# Altium PCB Keyfinder.PcbDoc
Units mm, origin at the board's own origin, x right, y up, seen from the top; angles counter-clockwise.
Board outline 46.05 x 36.17 mm, 2 copper layers (Top Layer, Bottom Layer); 23 components, 21 nets, 96 pads, 5 vias.
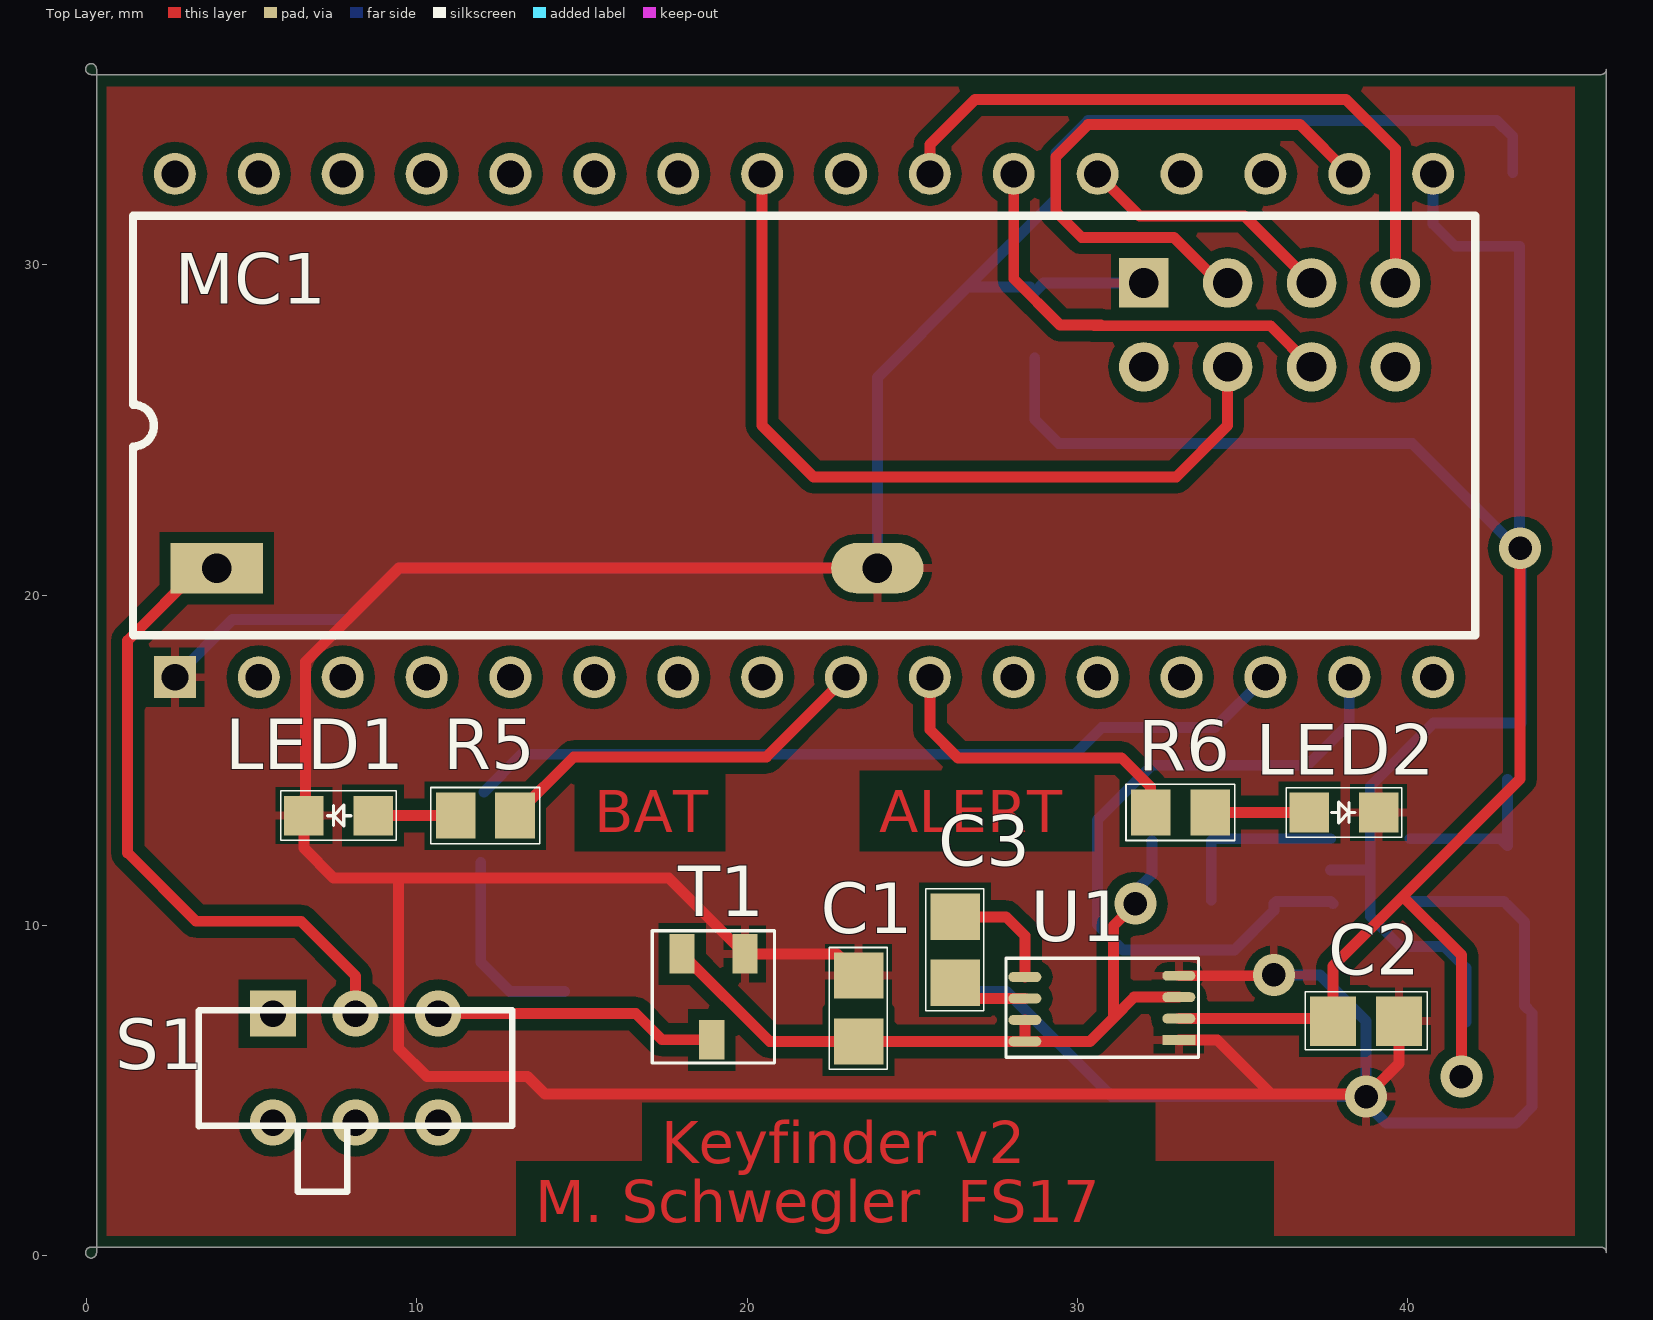
[diagram p0: Top Layer view]
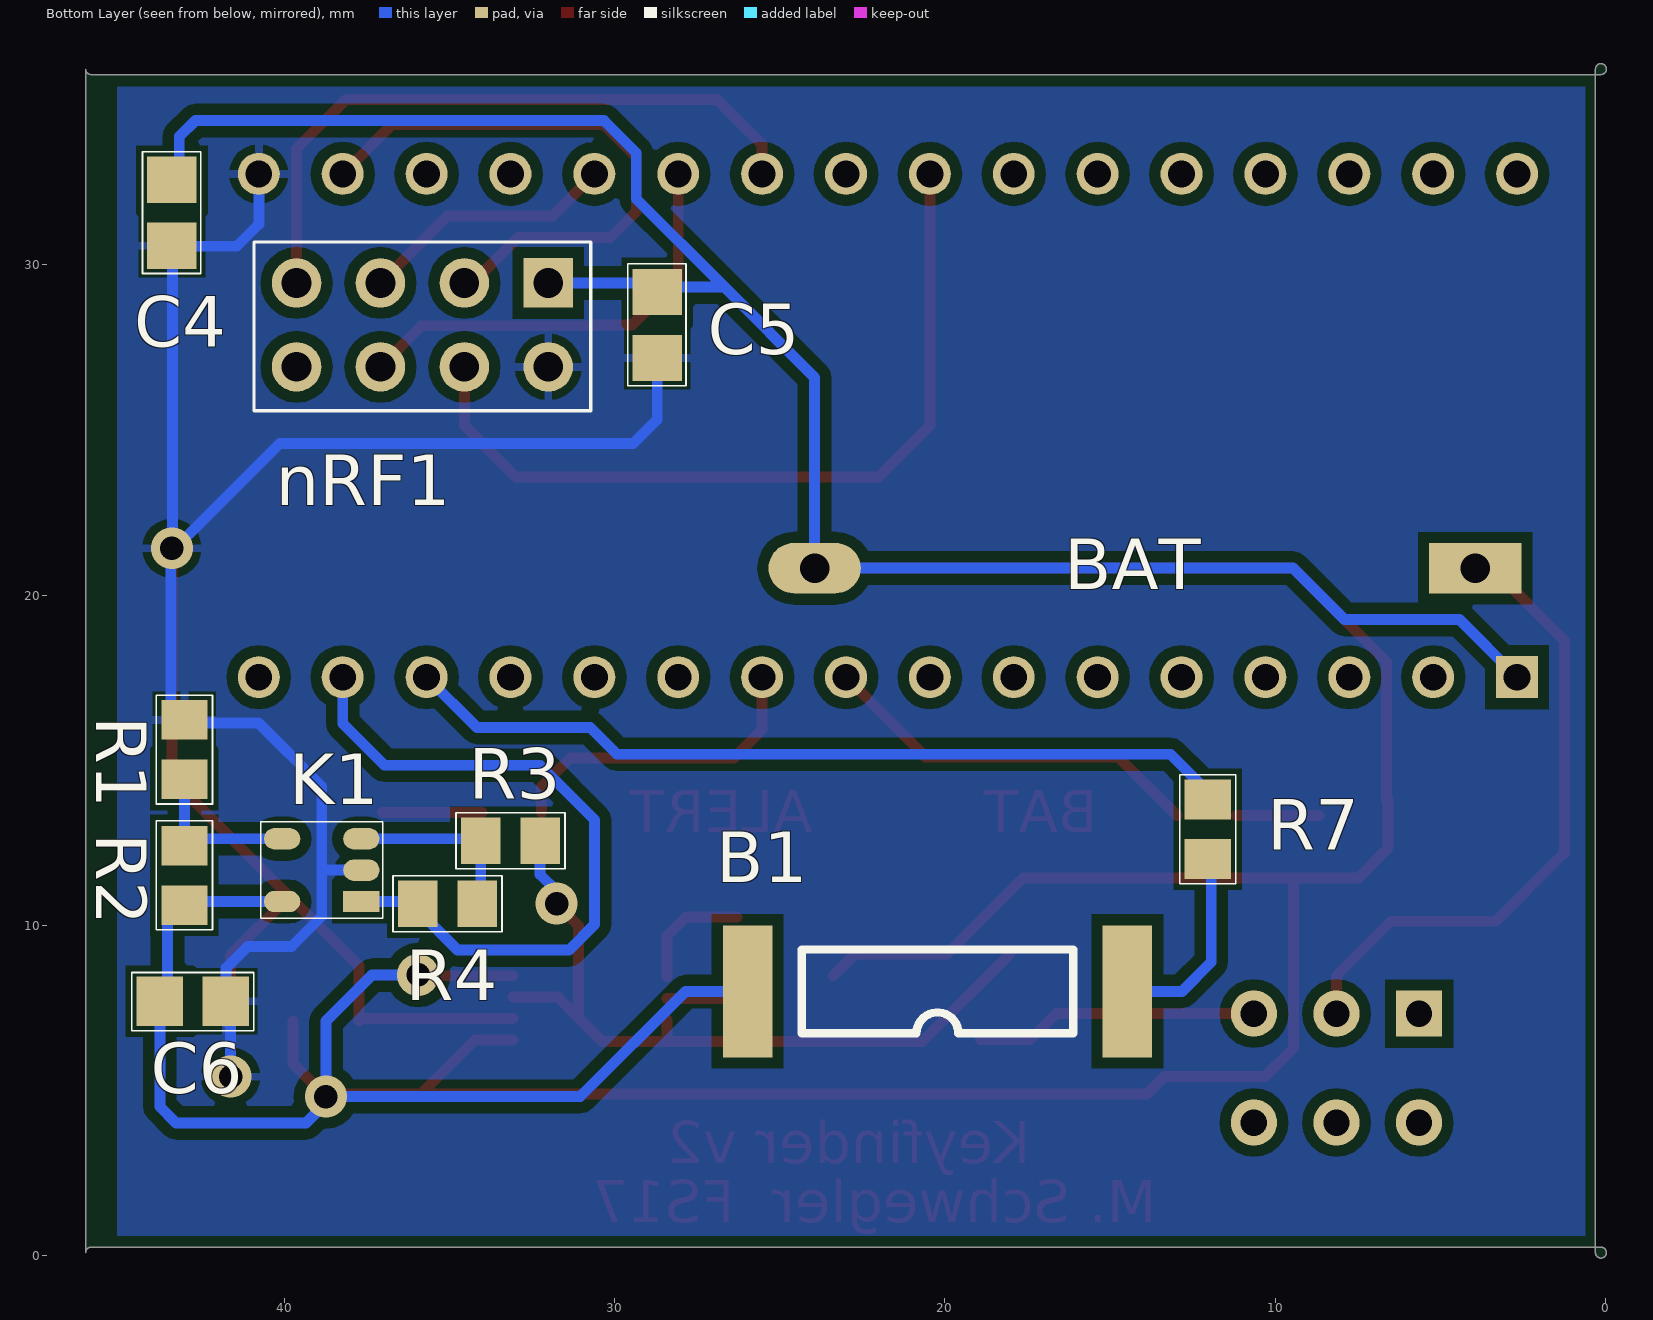
[diagram p1: Bottom Layer view, seen from below]
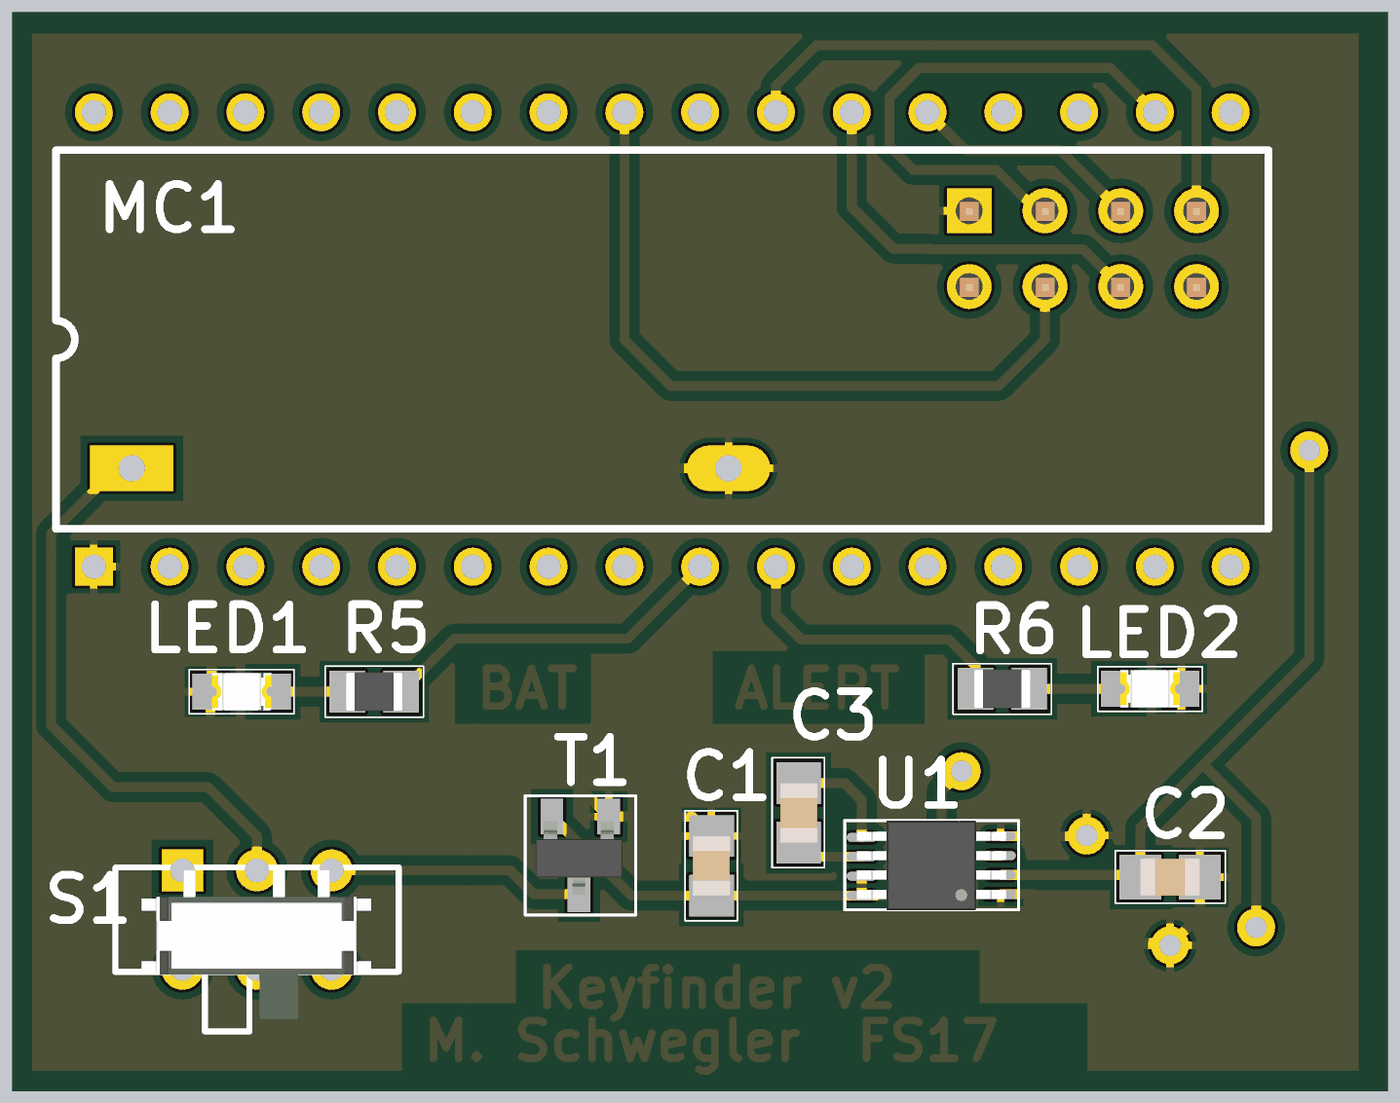
[diagram p2: 3D render of the assembled board from above, using the file's embedded part models]
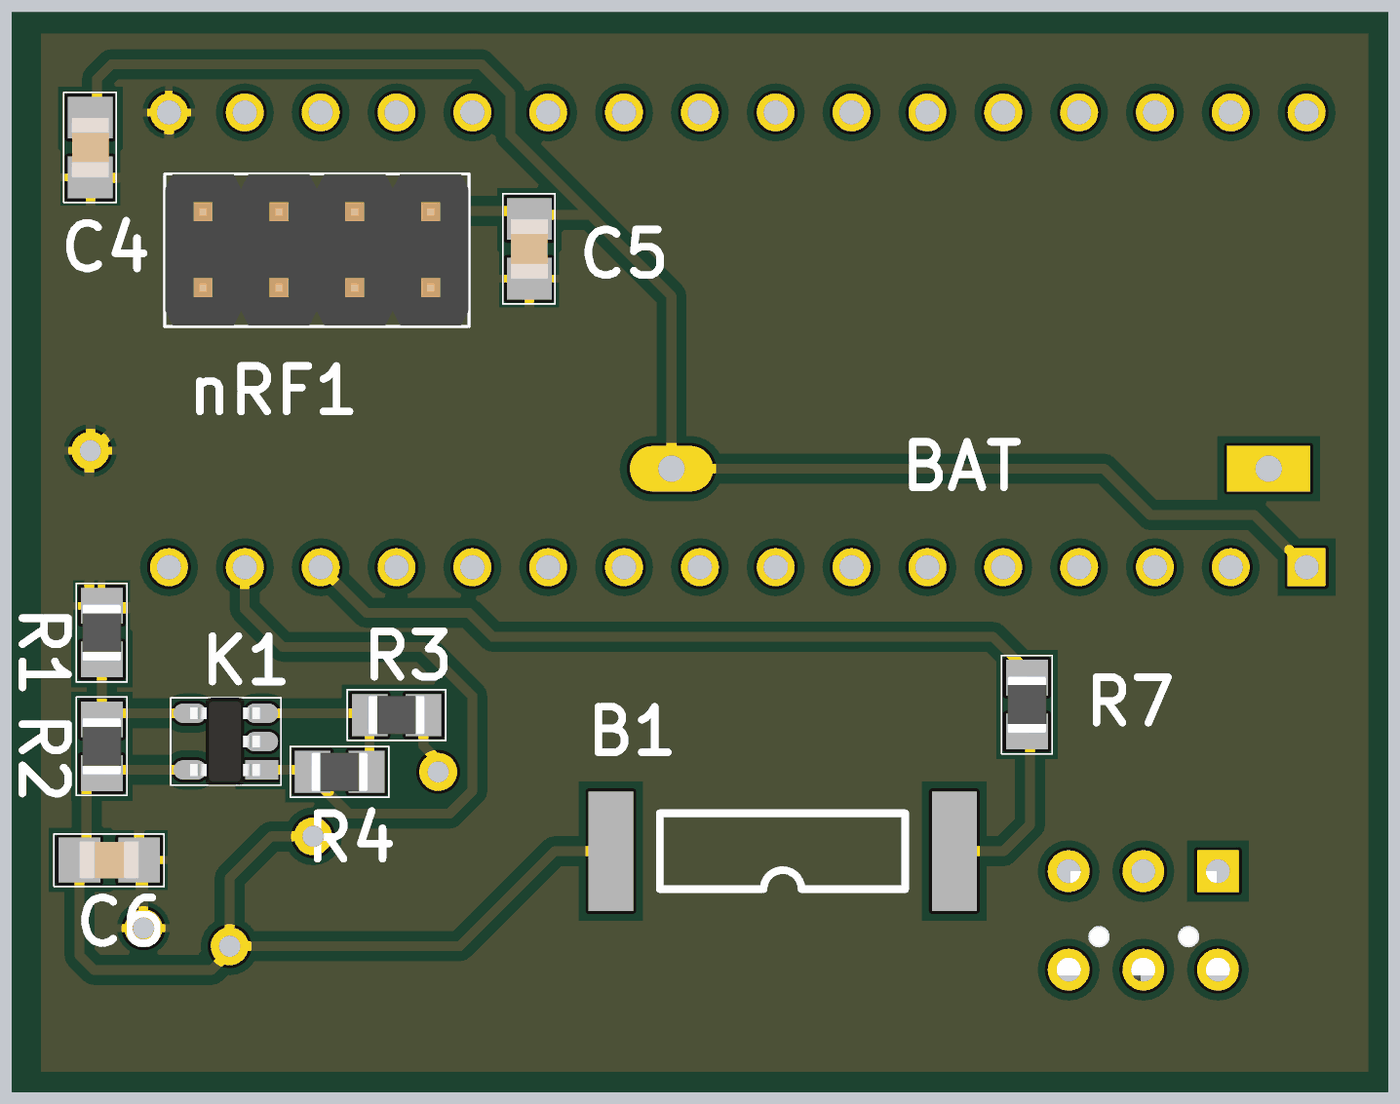
[diagram p3: 3D render of the assembled board from below, using the file's embedded part models]

## Layer stack, top to bottom
Top Solder: solder mask 0.0102, Solder Resist, Dk 3.5
Top Layer: signal copper 0.0356
Dielectric 1: dielectric 0.32, FR-4, Dk 4.8
Bottom Layer: signal copper 0.0356
Bottom Solder: solder mask 0.0102, Solder Resist, Dk 3.5

## Board outline
-0.028,0.092 cw(c0.138,0.092) 0.138,0.257 45.858,0.257 cw(c45.858,0.092) 46.023,0.092 46.023,35.931 cw(c45.858,35.931) 45.858,35.765 0.138,35.765 cw(c0.138,35.931) -0.028,35.931 cw(c0.138,35.931) 0.138,36.096 cw(c0.138,35.931) 0.303,35.931 0.303,0.092 cw(c0.138,0.092) 0.138,-0.074 cw(c0.138,0.092)

## Design rules (kind name [scope] priority, off if disabled: settings)
Clearance [All] p1: gap=0.33
PolygonConnect [All] p1: connectstyle=Relief reliefconductorwidth=0.254 reliefentries=4 polygonreliefangle="90 Angle" airgapwidth=0.254
RoomDefinition Keyfinder_MCU [InComponentClass('Keyfinder_MCU')] p1: confinementstyle=ConfineIn formatcopy=TRUE lockcomponents=FALSE outline 0.138,0.092 45.858,0.092 45.858,35.931 0.138,35.931
RoomDefinition Keyfinder_RF [InComponentClass('Keyfinder_RF')] p2: confinementstyle=ConfineIn formatcopy=TRUE lockcomponents=FALSE outline 0.138,0.092 45.858,0.092 45.858,35.931 0.138,35.931
RoomDefinition Keyfinder_Alert [InComponentClass('Keyfinder_Alert')] p3: confinementstyle=ConfineIn formatcopy=TRUE lockcomponents=FALSE outline 0.138,0.092 45.858,0.092 45.858,35.931 0.138,35.931
RoomDefinition Keyfinder_Power [InComponentClass('Keyfinder_Power')] p4: confinementstyle=ConfineIn formatcopy=TRUE lockcomponents=FALSE outline 0.138,0.092 45.858,0.092 45.858,35.931 0.138,35.931
RoutingVias [All] p1: holewidth=0.711 width=1.27 viastyle="Through Hole" minholewidth=0.711 minwidth=1.27 maxholewidth=0.711 maxwidth=1.27
SolderMaskExpansion [All] p1: expansion=0.102
UnpouredPolygon [All] p1: allowunpoured=FALSE
Width [All] p1: maxlimit=0.33 minlimit=0.33 preferedwidth=0.33
29 further rules are at their usual default settings.

## Classes and differential pairs
component class Keyfinder_Alert: B1 C6 K1 LED1 LED2 R1 R2 R3 R4 R5 R6 R7 T5 T6
component class Keyfinder_Power: BAT C1 C2 C3 S1 T1 U1
component class Keyfinder_RF: C5 nRF1
component class Keyfinder_MCU: C4 MC1

## Components (designator, comment, footprint, x,y, rotation, side; value= is the part's Value field where it differs from the comment)
B1 "Buzzer" piezo_ele 14.478,8.001 r0 bottom
BAT "CR2032" Bat_case 3.948,20.818 r0 bottom
C1 "10u" 0805_C 23.379,7.483 r270 top
C2 "10u" 0805_C 38.746,7.102 r180 top
C3 "1u" 0805_C 26.3,9.261 r270 top
C4 "100n" 0805_C 43.411,31.58 r270 bottom
C5 "10u" 0805_C 28.713,28.184 r270 bottom
C6 "100n" 0805_C 42.776,7.704 r180 bottom
K1 "MCP6561R" SOT23-5 38.873,11.674 r0 bottom
LED1 "Value" 0805_LED 7.631,13.325 r180 top
LED2 "Value" 0805_LED 38.077,13.419 r0 top
MC1 "TinyK20" DIP32 2.678,17.516 r90 top
nRF1 "nRF24L01+" CON_THT_2x4P_RM2.54_Stiftl 35.825,28.184 r0 bottom
R1 "100k" 0805_R 43.03,15.324 r270 bottom
R2 "220k" 0805_R 43.03,11.514 r270 bottom
R3 "100k" 0805_R 33.158,12.563 r180 bottom
R4 "3.3M" 0805_R 35.063,10.658 r180 bottom
R5 "1k" 0805_R 12.076,13.325 r180 top
R6 "1k" 0805_R 33.124,13.419 r0 top
R7 "680" 0805_R 12.042,12.911 r270 bottom
S1 "SW SPDT" SW_MCLSS22 8.146,5.68 r0 top
T1 "BSS84" SOT23-3 18.934,7.737 r180 top
U1 "MCP1252-33" MSOP8 30.745,7.483 r90 top

## Footprints (in the part's own frame and the unit in brackets; to place one, negate y for a bottom-side part, rotate by r counter-clockwise, add the part's x,y. Pads: shape width x height; smd on the part's side, far side on the other; paste and mask are expansions set on the pad)
0805_C [mm] "Chip Capasitor - 0805 Medium"
  rect 1.4x1.5 smd: 1(-1,0) 2(1,0)
  silkscreen extent -1.85,-0.89 1.84,0.87, body extent -1,-0.62 1,0.62, height 0.59
0805_LED [mm]
  rect 1.2x1.2 smd: 1(-1.05,0) 2(1.05,0)
  silkscreen extent -1.75,-0.75 1.75,0.75, body extent -1,-0.62 1,0.62, height 0.39
0805_R [mm] "Chip Resistor - 0805 Normal"
  rect 1.2x1.4 smd: 1(-0.9,0) 2(0.9,0)
  silkscreen extent -1.65,-0.85 1.65,0.85, body extent -0.95,-0.65 0.95,0.65, height 0.63
Bat_case [mil]
  rect 110x60 hole 35: 1(0,0)
  oval 110x60 hole 35: 2(787.4,0)
CON_THT_2x4P_RM2.54_Stiftl [mm] "Connector; Header; 2x4Position"
  rect 1.5x1.5 hole 0.9: 1(-3.81,-1.27)
  round 1.5 hole 0.9: 2(-3.81,1.27) 3(-1.27,-1.27) 4(-1.27,1.27) 5(1.27,-1.27) 6(1.27,1.27) 7(3.81,-1.27) 8(3.81,1.27)
  silkscreen extent -5.1,-2.51 5.1,2.6, body extent -5.08,-2.51 5.08,2.57, height 8.57
DIP32 [mil]
  rect 50x50 hole 32: 1(0,0)
  round 50 hole 32: 2(0,-100) 3(0,-200) 4(0,-300) 5(0,-400) 6(0,-500) 7(0,-600) 8(0,-700) 9(0,-800) 10(0,-900) 11(0,-1000) 12(0,-1100) 13(0,-1200) 14(0,-1300) 15(0,-1400) 16(0,-1500) 17(600,-1500) 18(600,-1400) 19(600,-1300) 20(600,-1200) 21(600,-1100) 22(600,-1000) 23(600,-900) 24(600,-800) 25(600,-700) 26(600,-600) 27(600,-500) 28(600,-400) 29(600,-300) 30(600,-200) 31(600,-100) 32(600,0)
  silkscreen extent 50,-1550 550,50
MSOP8 [mm]
  rect 0.3x1 smd: 1(-0.956,-2.332)
  oval 0.3x1 smd: 2(-0.306,-2.332) 3(0.344,-2.332) 4(0.994,-2.332) 5(0.956,2.332) 6(0.306,2.332) 7(-0.344,2.332) 8(-0.994,2.332)
  silkscreen extent -1.47,-2.93 1.52,2.9, body extent -1.48,-2.51 1.52,2.49, height 0.92
piezo_ele [mm]
  rect 1.5x4 smd: 1(0,0) 2(11.5,0)
  silkscreen extent 1.64,-1.27 9.86,1.27
SOT23-3 [mm]
  rect 0.76x1.2 smd: 1(-1,-1.4) 2(0.9,-1.4) 3(0,1.2)
  silkscreen extent -1.9,-2.1 1.8,1.9, body extent -1.46,-1.25 1.46,1.23, height 1
SOT23-5 [mm] "SOT23, 5-Leads, Body 2.9x1.6mm, Pitch 0.95mm, Lead Span 2.8mm, IPC Medium Density"
  rect 1.1x0.65 smd: 1(-1.2,0.95)
  oval 1.1x0.65 smd: 2(-1.2,0) 3(-1.2,-0.95) 4(1.2,-0.95) 5(1.2,0.95)
  silkscreen extent -1.85,-1.46 1.85,1.46, body extent -1.14,-1.46 1.2,1.46, height 1
SW_MCLSS22 [mm]
  rect 1.4x1.4 hole 0.8: 1(-2.5,1.65)
  round 1.4 hole 0.8: 2(0,1.65) 3(2.5,1.65) 4(-2.5,-1.65) 5(0,-1.65) 6(2.5,-1.65)
  silkscreen extent -4.75,-3.75 4.75,1.75, body extent -3.87,-3.34 3.83,1.66, height 1.4

## Part data
B1: library part SPEAKER
BAT: library part BATTERY
C1 C2 C3 C4 C5 C6: library part C?, "Normaler Kondensator"
K1: library part OPAMP
LED1 LED2: library part LED
nRF1: library part Bluefruit
R1 R2 R3 R4 R5 R6 R7: library part R?, "Normaler Widerstand"
T1: library part "MOSFET-P 1G,2D,3S (Diode)", "MOSFET-P 1G,2D,3S (Diode)"
U1: library part VOLTREG

## Via types
v1: diameter 1.27, hole 0.711, Top Layer to Bottom Layer, 5 vias

## Nets (pads, with @x,y where several pads share a name; then routed paths per layer and width w, separated by ;. In a path a pad name is that pad's centre, name@x,y a point inside that pad or via, vN(x,y) a via of type N, cw(c..) or ccw(c..) an arc to the next point about the centre after c; other vN are vias at no path point)
3V3: C2.2 C4.2 C5.2 C6.2 K1.2 MC1.17 nRF1.2 R1.1 U1.2 | length 81.5
  Top Layer w0.33: U1.2 C2.2@37.671,7.176 ; C2.2 37.746,8.769 39.856,10.879 ; v1(41.633,5.418) 41.633,9.103 39.856,10.879 ; v1(43.411,21.42) 43.411,14.434 39.856,10.879
  Bottom Layer w0.33: C5.2 28.713,25.324 29.441,24.595 40.143,24.595 v1@43.364,21.374 ; K1.2 38.873,11.674 ; MC1.17 40.778,31.233 41.446,30.564 43.395,30.564 v1@43.395,21.436 ; v1(41.633,5.418) 41.633,6.926 ; C6.2@41.776,7.069 41.776,8.704 41.125,9.355 39.794,9.355 38.873,10.277 38.873,11.674 ; v1@43.445,21.293 43.445,16.13 40.789,16.13 38.873,14.214 38.873,11.674
ALERT_BUZZER: MC1.14 R7.1 | length 25.1
  Bottom Layer w0.33: R7.1@12.031,14.043 13.169,15.181 29.933,15.181 30.743,15.992 34.174,15.992 MC1.14
ALERT_LED: MC1.10 R6.1 | length 9.8
  Top Layer w0.33: MC1.10 25.538,15.926 26.393,15.07 31.346,15.07 32.224,14.192 R6.1
BAT: C1.2 R3.2 T1.2 U1.3 U1.7 U1.8 | length 23.2
  Top Layer w0.33: T1.2 20.688,6.483 C1.2 ; C1.2@23.385,6.489 U1.8 ; U1.7 U1.8 ; v1(31.761,10.658) 31.093,9.99 31.093,7.196 ; U1.3 31.724,7.827 31.093,7.196 ; U1.8 30.386,6.489 31.093,7.196
  Bottom Layer w0.33: v1(31.761,10.658) 31.761,11.039 32.258,11.535 R3.2
BAT_KON: K1.1 MC1.15 R4.1 | length 21.5
  Bottom Layer w0.33: R4.1 35.963,10.457 34.766,9.261 31.38,9.261 30.618,10.023 30.618,13.198 32.269,14.849 36.968,14.849 38.238,16.119 MC1.15 ; R4.1@36.029,10.723 K1.1 K1.1@37.741,10.655
BAT_KON_LED: MC1.9 R5.1 | length 11.8
  Top Layer w0.33: R5.1 14.754,15.103 20.585,15.103 MC1.9
GND: B1.2 BAT.2 C1.1 C2.1 C4.1 C5.1 C6.1 K1.5 LED1.2 LED2.2 MC1.1 nRF1.1 R2.2 T1.1 U1.1 U1.4 | length 179.6
  Top Layer w0.33: 9.451,11.279 9.451,6.28 10.305,5.426 13.353,5.426 13.888,4.891 35.876,4.891 ; C1.1 22.725,9.137 T1.1 17.63,11.44 7.483,11.44 6.581,12.342 LED1.2 6.581,13.833 6.627,13.786 6.627,17.984 9.461,20.818 BAT.2 ; U1.1 34.241,6.527 35.876,4.891 ; U1.4 36.057,8.477 v1@36.079,8.499 ; v1@38.67,4.891 35.876,4.891 ; v1(38.746,4.816) 39.746,5.816 C2.1
  Bottom Layer w0.33: MC1.1 4.423,19.261 7.905,19.261 9.461,20.818 BAT.2 23.948,26.594 26.681,29.327 ; B1.2 27.86,8.001 31.045,4.816 v1(38.746,4.816) ; C5.1@28.57,29.327 26.681,29.327 ; C5.1 28.983,29.454 nRF1.1 ; v1(35.952,8.499) 37.349,8.499 38.746,7.102 v1(38.746,4.816) ; K1.5 R2.2@42.921,10.723 ; R2.2 43.538,10.106 43.538,7.577 43.776,7.339 43.776,4.513 43.284,4.021 39.347,4.021 38.746,4.623 v1(38.746,4.816) ; C4.1@43.187,32.804 43.187,33.886 42.699,34.374 30.331,34.374 29.348,33.391 29.348,31.994 26.681,29.327
NetB1_1: B1.1 R7.2 | length 5.9
  Bottom Layer w0.33: R7.2@11.938,11.907 11.938,8.89 12.827,8.001 B1.1
NetBAT_1: BAT.1 S1.2 | length 19.6
  Top Layer w0.33: BAT.1 3.438,20.818 1.247,18.626 1.247,12.198 3.32,10.125 6.495,10.125 8.146,8.474 S1.2
NetC3_1: C3.1 U1.5 | length 3.6
  Top Layer w0.33: C3.1 27.84,10.261 28.413,9.687 U1.5
NetC3_2: C3.2 U1.6 | length 2.3
  Top Layer w0.33: C3.2 26.772,7.789 U1.6
NetK1_3: K1.3 R3.1 R4.2 | length 5.4
  Bottom Layer w0.33: R4.2@34.058,10.762 R3.1 34.119,12.624 K1.3
NetK1_4: K1.4 R1.2 R2.1 | length 5.1
  Bottom Layer w0.33: K1.4 42.821,12.624 R2.1 R1.2
NetLED1_1: LED1.1 R5.2 | length 2.5
  Top Layer w0.33: LED1.1 R5.2
NetLED2_1: LED2.1 R6.2 | length 3
  Top Layer w0.33: R6.2 LED2.1
NetS1_3: S1.3 T1.3 | length 8.6
  Top Layer w0.33: S1.3 16.632,7.33 17.426,6.537 T1.3
NRF_CE: MC1.18 nRF1.3 | length 17.7
  Top Layer w0.33: nRF1.3 34.302,29.454 32.931,30.825 30.135,30.825 29.348,31.613 29.348,33.264 30.331,34.247 36.746,34.247 MC1.18
NRF_CSN: MC1.25 nRF1.4 | length 24.8
  Top Layer w0.33: MC1.25 20.458,25.136 22.014,23.579 32.998,23.579 34.555,25.136 nRF1.4
NRF_MISO: MC1.23 nRF1.7 | length 20.2
  Top Layer w0.33: MC1.23 25.538,33.645 26.902,35.009 38.143,35.009 39.635,33.518 nRF1.7
NRF_MOSI: MC1.22 nRF1.6 | length 13.5
  Top Layer w0.33: MC1.22 28.078,29.581 29.475,28.184 30.72,28.184 ; 30.515,28.159 35.849,28.159 nRF1.6
NRF_SCK: MC1.21 nRF1.5 | length 7.8
  Top Layer w0.33: MC1.21 31.888,31.486 35.063,31.486 nRF1.5
pads on no net: MC1.2 MC1.3 MC1.4 MC1.5 MC1.6 MC1.7 MC1.8 MC1.11 MC1.12 MC1.13 MC1.16 MC1.19 MC1.20 MC1.24 MC1.26 MC1.27 MC1.28 MC1.29 MC1.30 MC1.31 MC1.32 nRF1.8 S1.1 S1.4 S1.5 S1.6

## Polygon pours and split planes (outlines as drawn)
GND on Top Layer "Top Layer-No Net" (solid, pour order 4): 0.612,0.6 45.062,0.6 45.062,35.39 0.612,35.39
3V3 on Bottom Layer "Bottom Layer-No Net" (solid, pour order 3): 0.612,0.6 45.062,0.6 45.062,35.39 0.612,35.39

## Other copper
Top Layer:
  text "BAT" at 15.367,12.827 h1.27
  text "ALERT" at 24.003,12.827 h1.27
  text "Keyfinder v2" at 17.399,2.794 h1.27
  text "M. Schwegler  FS17" at 13.589,1.016 h1.27

## Silkscreen, mask and mechanical layers (free items; w line width, h text height)
Mechanical 1:
  lines w0.33: 0.138,0.092 0.138,35.931 45.858,35.931 45.858,0.092 0.138,0.092